# EAGLE board Networking (EAGLE 6.2)
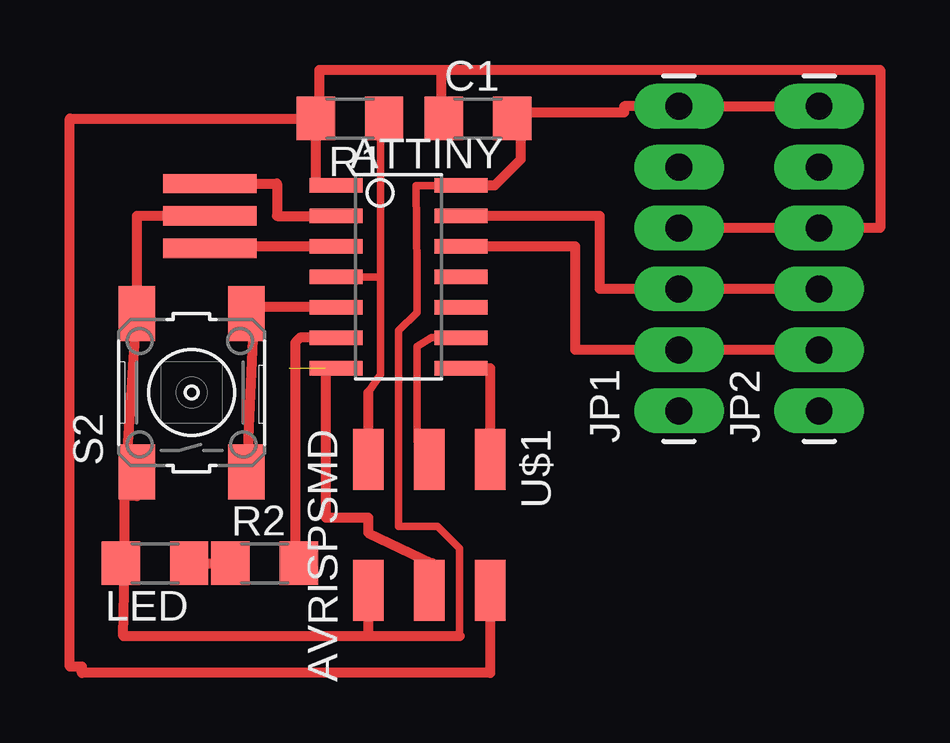
[diagram p0: board, top side]

No outline drawn. Coordinates in mm, seen from the top.
Copper layers (1*16): Top 0.035mm / dielectric 1.5mm / Bottom 0.035mm
Design rules: minimum track width 10mil, minimum drill 24mil, track to track 8mil, track to pad 8mil, pad to pad 8mil, via to via 8mil, smd to smd 8mil, copper to edge 40mil, drill to drill 8mil, minimum pad ring 10mil, minimum via ring 8mil, stop-mask expansion 4mil, vias tented up to drill 0mil, thermal gap 10mil

## Footprints (pad centres in the part's own frame; a part is rotated, then mirrored left to right if it is on the bottom)
SOIC14 = smd 0.61 x 2.21: 1 -3.81,-2.603; 2 -2.54,-2.603; 3 -1.27,-2.603; 4 0,-2.603; 5 1.27,-2.603; 6 2.54,-2.603; 7 3.81,-2.603; 8 3.81,2.603; 9 2.54,2.603; 10 1.27,2.603; 11 0,2.603; 12 -1.27,2.603; 13 -2.54,2.603; 14 -3.81,2.603
1206 = smd 1.6 x 1.803: 1 -1.422,0; 2 1.422,0
1X06_LONGPADS = drill 1.118 pad 1.88 long: 1 0,0; 2 2.54,0; 3 5.08,0; 4 7.62,0; 5 10.16,0; 6 12.7,0
EFOBM = smd 0.8 x 3.9: 1 -1.35,0; 2 0,0; 3 1.35,0
6MM_SWITCH = smd 2.286 x 1.524: 1 -3.302,2.286; 2 3.302,2.286; 3 -3.302,-2.286; 4 3.302,-2.286
2X03SMD = smd 2.54 x 1.27: 1 -2.54,2.54; 2 2.92,2.54; 3 -2.54,0; 4 2.92,0; 5 -2.54,-2.54; 6 2.92,-2.54

## Placement (x,y rotation side)
ATTINY  ATTINY44-SSU  [SOIC14]  40.64,27.94 270 top
C1  [1206]  43.94,34.54 0 top
JP1  [1X06_LONGPADS]  52.32,22.35 90 top
JP2  [1X06_LONGPADS]  58.17,22.35 90 top
LED  [1206]  30.48,16 180 top
QUARTZ  RESONATOR  [EFOBM]  32.77,30.48 90 top
R1  [1206]  38.61,34.54 180 top
R2  [1206]  35.05,16 0 top
S2  [6MM_SWITCH]  32,23.11 90 top
U$1  AVRISPSMD  [2X03SMD]  41.91,17.78 270 top

## Library data of the parts
ATTINY QUARTZ S2 U$1 = fab
C1 = FAB_Hello
JP1 JP2 = SparkFun-Connectors
LED R1 R2 = ng

## Nets
BUT: ATTINY.5 S2.3 S2.4
GND: ATTINY.14 C1.2 JP1.6 JP2.6 LED.2 QUARTZ.2 S2.1 S2.2 U$1.6
LED: ATTINY.6 R2.2
LEDRES: LED.1 R2.1
MISO: ATTINY.8 U$1.1
MOSI: ATTINY.7 U$1.4
N$17: ATTINY.10
RST: ATTINY.4 R1.1 U$1.5
RX: ATTINY.12 JP1.2 JP2.2
SCK: ATTINY.9 U$1.3
TX: ATTINY.13 JP1.3 JP2.3
VCC: ATTINY.1 C1.1 JP1.4 JP2.4 R1.2 U$1.2
XTAL1: ATTINY.2 QUARTZ.3
XTAL2: ATTINY.3 QUARTZ.1

## Tracks (layer width: path | path; a pad name or v marks a point on that pad's centre or on a via)
BUT
  Top 0.406: ATTINY.5 34.6,26.67 34.54,25.34 | S2.4 34.54,25.34 | 34.54,25.34 S2.3
GND
  Top 0.305: ATTINY.14 41.36,31.75 41.4,28.19 41.4,26.46 40.64,25.7 40.64,17.53 42.26,17.53 43.18,16.61 43.18,12.95
  Top 0.406: ATTINY.14 44.64,31.75 45.72,32.83 45.72,34.54 C1.2 45.36,34.8 50.04,34.8 50.04,35.05 JP1.6 JP2.6 | U$1.6 39.37,12.95 | 39.37,12.95 29.15,12.95 29.21,15.75 | 29.21,15.75 29.21,18.8 | S2.1 29.72,18.8 29.21,18.8 | LED.2 29.21,15.75 | 43.18,12.95 39.37,12.95 | 29.21,18.8 S2.2 29.72,30.48 QUARTZ.2
LED
  Top 0.406: ATTINY.6 36.53,25.4 36.32,25.19 36.32,16.76 R2.2
LEDRES
  Top 0.406: LED.1 R2.1
MISO
  Top 0.406: ATTINY.8 44.45,24.13 U$1.1
MOSI  (1 unrouted)
  Top 0.406: ATTINY.7 37.59,24.13 37.59,17.9 39.37,17.9 39.37,17.27 42.03,16 41.95,14.73 41.91,14.01 U$1.4
RST
  Top 0.305: 39.88,34.54 39.88,27.94 | 39.88,27.94 39.88,23.88 39.37,23.11 | ATTINY.4 39.88,27.94
  Top 0.406: R1.1 39.88,34.54 | 39.37,23.11 U$1.5
RX
  Top 0.406: JP2.2 JP1.2 48.01,24.89 48.01,29.21 ATTINY.12
SCK
  Top 0.305: ATTINY.9 42.02,25.4 41.4,25.04 41.4,21.08 U$1.3
TX
  Top 0.406: JP2.3 JP1.3 49.02,27.43 49.02,30.48 ATTINY.13
VCC
  Top 0.406: ATTINY.1 37.19,31.75 R1.2 | R1.2 37.34,34.54 37.34,36.58 42.42,36.58 | U$1.2 44.45,11.43 27.43,11.43 27.43,11.68 26.92,11.68 26.92,34.54 R1.2 | 42.42,36.58 60.71,36.58 60.71,29.97 JP2.4 JP1.4 | C1.1 42.42,34.54 42.42,36.58
XTAL1
  Top 0.406: QUARTZ.3 35.56,31.83 35.56,30.48 ATTINY.2
XTAL2
  Top 0.406: ATTINY.3 32.77,29.21 QUARTZ.1